# Altium PCB Module1BrandonPollack.PcbDoc
Units mil, origin at the board's own origin, x right, y up, seen from the top; angles counter-clockwise.
Board outline 1910 x 1505 mil, 2 copper layers (Top Layer, Bottom Layer); 22 components, 16 nets, 63 pads, 5 vias.
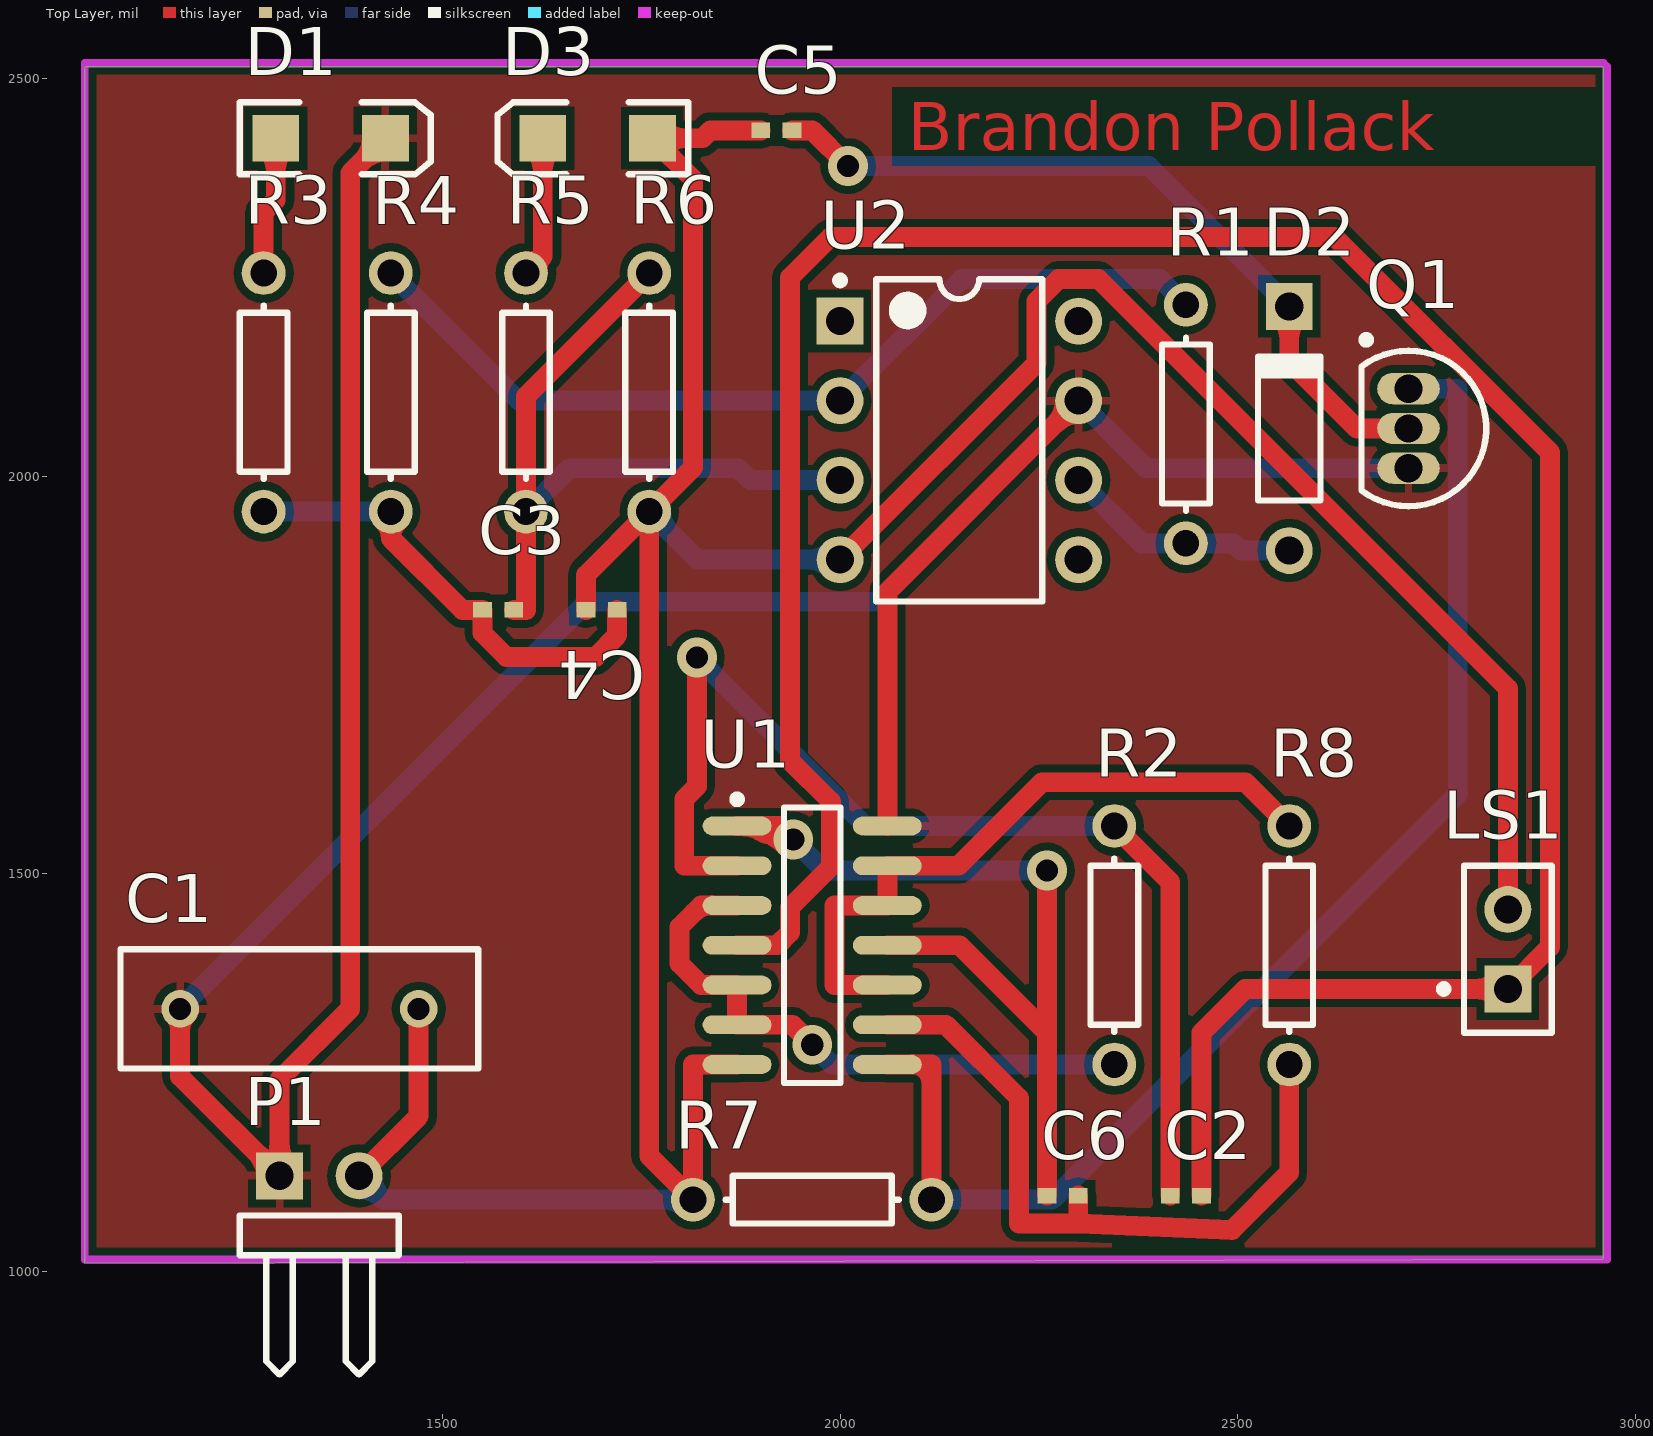
[diagram p0: Top Layer view]
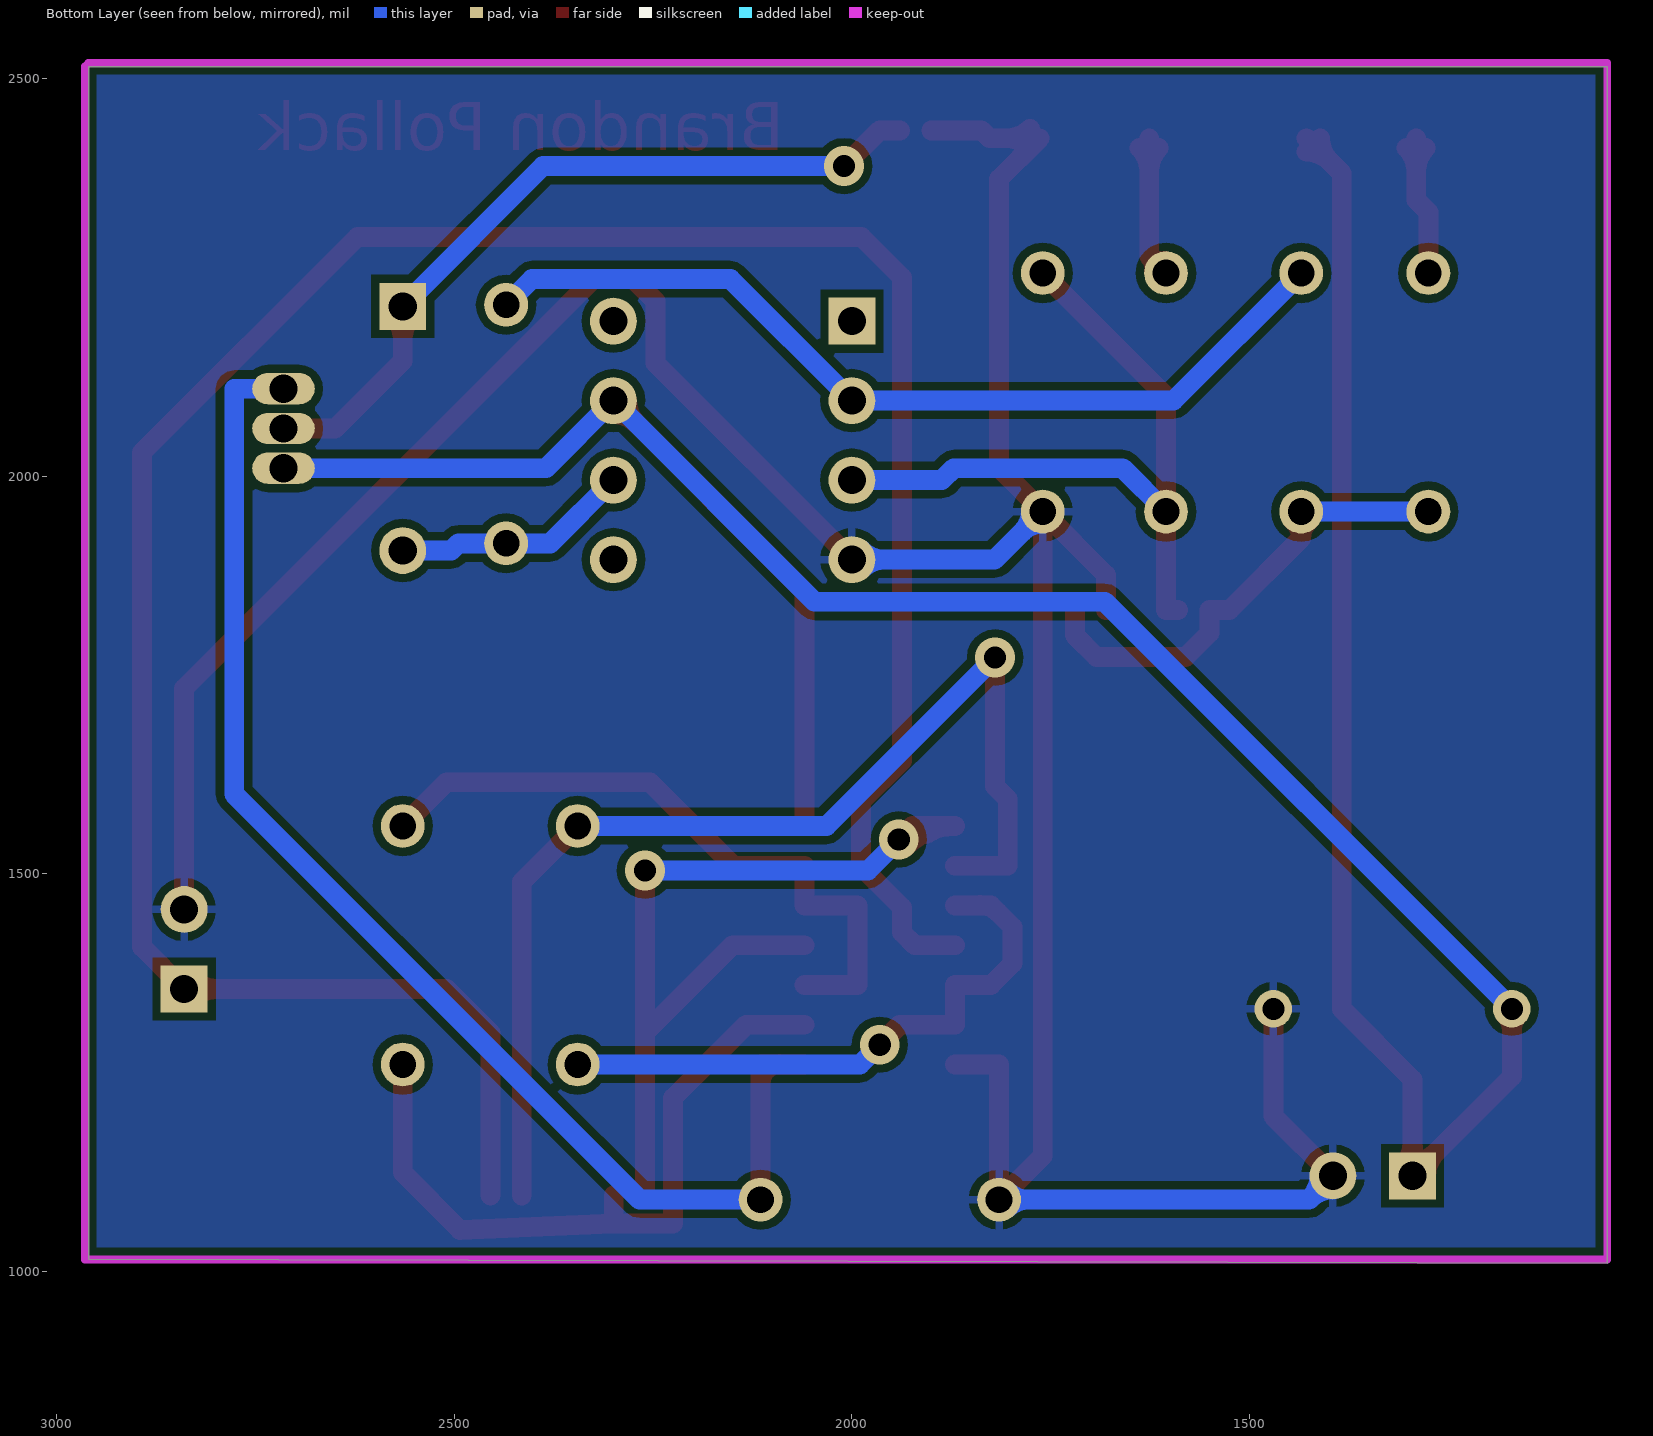
[diagram p1: Bottom Layer view, seen from below]

## Layer stack, top to bottom
Top Layer: signal copper 1.4
Dielectric: dielectric 12.6, FR-4, Dk 4.8
Bottom Layer: signal copper 1.4

## Board outline
1050,1010 1050,2515 2960,2515 2960,1015

## Design rules (kind name [scope] priority, off if disabled: settings)
Clearance [All] p1: gap=10
PolygonConnect [All] p1: connectstyle=Relief reliefconductorwidth=10 reliefentries=4 polygonreliefangle="90 Angle" airgapwidth=10
RoutingVias [All] p1: holewidth=28 width=50 viastyle="Through Hole" minholewidth=28 minwidth=50 maxholewidth=28 maxwidth=50
SilkscreenOverComponentPads [All] p1: minsilkscreentomaskgap=10
SolderMaskExpansion [All] p1: expansion=4
Width [All] p1: maxlimit=30 minlimit=20 preferedwidth=25
27 further rules are at their usual default settings.

## Components (designator, comment, footprint, x,y, rotation, side; value= is the part's Value field where it differs from the comment)
C1 "Cap" RAD-0.3 1320,1330 r180 top
C2 "Cap" 0402 2435,1095 r0 top
C3 "Cap" 0402 1570,1831.81 r180 top
C4 "Cap" 0402 1700,1831.81 r0 top
C5 "Cap" 0402 1920,2435 r0 top
C6 "Cap" 0402 2280,1095 r180 top
D1 "LED2" 3.2X1.6X1.1 1359.17,2425 r0 top
D2 "Diode 1N4149" DO-35A 2565,2060 r90 top
D3 "LED2" 3.2X1.6X1.1 1695,2425 r180 top
LS1 "Speaker" PIN2 2840,1355 r90 top
P1 "Header 2H" HDR1X2H 1295,1120 r0 top
Q1 "2N3904" TO-92A 2715,2060 r180 top
R1 "Res1" AXIAL-0.3 2435,2065.51 r90 top
R2 "Res1" AXIAL-0.3 2345,1410 r270 top
R3 "Res1" AXIAL-0.3 1275,2105.51 r270 top
R4 "Res1" AXIAL-0.3 1435,2105.51 r90 top
R5 "Res1" AXIAL-0.3 1605,2105.51 r270 top
R6 "Res1" AXIAL-0.3 1760,2105.51 r90 top
R7 "Res1" AXIAL-0.3 1965,1090 r180 top
R8 "Res1" AXIAL-0.3 2565,1410 r90 top
U1 "CD4093BCM" M14A_N 1965,1410 r0 top
U2 "LM741J" J08A 2150,2045 r0 top

## Footprints (in the part's own frame and the unit in brackets; to place one, negate y for a bottom-side part, rotate by r counter-clockwise, add the part's x,y. Pads: shape width x height; smd on the part's side, far side on the other; paste and mask are expansions set on the pad)
3.2X1.6X1.1 [mm] "SMT LED; 2 Flat Leads"
  rect 1.5x1.5 smd: 1(-1.75,0) 2(1.75,0)
  silkscreen extent -2.9,-1.15 3.2,1.15
0402 [mm] "Chip Capacitor, Body 1.0x0.5mm, IPC High Density"
  rect 0.6x0.5 smd: 1(-0.5,0) 2(0.5,0)
  body extent -0.55,-0.3 0.55,0.3, height 1.3
AXIAL-0.3 [mm] "Axial Device, Thru-Hole; 2 Leads; 0.3 in Pin Spacing"
  round 1.4 hole 0.85: 1(-3.81,0) 2(3.81,0)
  silkscreen extent -2.77,-0.76 2.77,0.76
DO-35A [mm] "Diode, Axial; Body 4.6 x 1.9 mm (LxDia. max), Lead Dia. 0.53 mm (max)"
  round 1.5 hole 0.9: 1(-3.9,0)
  rect 1.5x1.5 hole 0.9: 2(3.9,0)
  silkscreen extent -2.3,-1 2.4,1
HDR1X2H [mm] "Connector; Header; 2 Position; Right Angle"
  rect 1.5x1.5 hole 0.9: 1(0,0)
  round 1.5 hole 0.9: 2(2.54,0)
  silkscreen extent -1.27,-6.35 3.81,-1.27
J08A [mm] "DIP, 8-Leads, Row Spacing 7.62mm, Pitch 2.54mm, Body 9.78x6.73mm"
  rect 1.5x1.5 hole 0.9: 1(-3.81,3.81)
  round 1.5 hole 0.9: 2(-3.81,1.27) 3(-3.81,-1.27) 4(-3.81,-3.81) 5(3.81,-3.81) 6(3.81,-1.27) 7(3.81,1.27) 8(3.81,3.81)
  silkscreen extent -3.93,-5.15 2.65,5.23, body extent -3.6,-5.15 3.6,5.15, height 5.08
M14A_N [mm] "SOIC, 14-Leads, Body 8.6x3.9mm, Pitch 1.27mm, IPC Medium Density"
  oval 2.2x0.6 smd: 1(-2.4,3.81) 2(-2.4,2.54) 3(-2.4,1.27) 4(-2.4,0) 5(-2.4,-1.27) 6(-2.4,-2.54) 7(-2.4,-3.81) 8(2.4,-3.81) 9(2.4,-2.54) 10(2.4,-1.27) 11(2.4,0) 12(2.4,1.27) 13(2.4,2.54) 14(2.4,3.81)
  silkscreen extent -2.52,-4.4 0.9,4.78, body extent -2,-4.38 2,4.38, height 1.75
PIN2 [mm] "Photosensitive Diode; 2 Leads"
  rect 1.5x1.5 hole 0.9: 1(0,0)
  round 1.5 hole 0.9: 2(2.54,0)
  silkscreen extent -1.4,-1.4 3.94,2.17
RAD-0.3 [mm] "Radial Cap, Thru-Hole; 2 Leads; 0.3 in Pin Spacing"
  round 1.2 hole 0.7: 1(-3.81,0) 2(3.81,0)
  silkscreen extent -5.71,-1.91 5.71,1.91
TO-92A [mm] "TO, Flat Index; 3 In-Line, Axial Leads; Body Dia. 4.5mm; Leads 0.51 x 0.48 mm (max)"
  oval 2x1 hole 0.9: 1(0,-1.27) 2(0,0) 3(0,1.27)
  silkscreen extent -2.48,-2.95 1.5,2.48, body extent -2.5,-2.5 1.5,2.5, height 6.86

## Part data
C1 C2 C3 C4 C5 C6: "Capacitor"
D1 D3: "Typical RED, GREEN, YELLOW, AMBER GaAs LED"
D2: "Computer Diode"
LS1: "Loudspeaker"
P1: "Header, 2-Pin, Right Angle"
Q1: "NPN General Purpose Amplifier"
R1 R2 R3 R4 R5 R6 R7 R8: "Resistor"
U1: "Quad 2-Input Schmitt-Trigger NAND Gate, 14-Pin SOIC"
U2: "Operational Amplifier, 8-pin CerDIP"

## Via types
v1: diameter 50, hole 28, Top Layer to Bottom Layer, 5 vias

## Nets (pads, with @x,y where several pads share a name; then routed paths per layer and width w, separated by ;. In a path a pad name is that pad's centre, name@x,y a point inside that pad or via, vN(x,y) a via of type N, cw(c..) or ccw(c..) an arc to the next point about the centre after c; other vN are vias at no path point)
FEEDBACK: R1.2 R4.2 U2.2 | length 1143.3
  Bottom Layer w25: R4.2 1595.51,2095 U2.2 2153,2248 2402.51,2248 R1.2
GND: C1.1 C4.1 C5.1 D3.1 LS1.2 P1.2 R6.1 R7.2 U1.7 U2.4 | length 5002.2
  Top Layer w25: P1.2 1470,1195 C1.1 ; C4.1 1680.32,1875.83 R6.1 ; U1.7 1815,1260 R7.2 1760,1145 R6.1 ; C5.1 1837,2435 1827,2425 D3.1 1815,2373.9 1815,2010.51 R6.1 ; U2.4 2247,2142 2247,2220 2275,2248 2325,2248 2840,1733 LS1.2 ; 1805.01,2425 cw(c1805.01,2466.11) 1775.94,2437.04 ccw(c1805.01,2466.11) 1805.01,2425 ; 1805.01,2425 ccw(c1805.01,2383.89) 1775.94,2412.96 cw(c1805.01,2383.89) 1805.01,2425
  Bottom Layer w25: P1.2 1425,1090 R7.2 ; R6.1 1820.51,1895 U2.4 ; 1424.07,1090.93 cw(c1453.14,1120) 1412.03,1120 ccw(c1453.14,1120) 1424.07,1090.93 ; 1424.07,1090.93 ccw(c1395,1061.86) 1395,1102.97 cw(c1395,1061.86) 1424.07,1090.93 ; 1778.64,1090 cw(c1778.64,1053.64) 1804.35,1079.35 ccw(c1778.64,1053.64) 1778.64,1090 ; 1778.64,1090 ccw(c1778.64,1126.36) 1804.35,1100.65 cw(c1778.64,1126.36) 1778.64,1090 ; 1785.71,1929.8 cw(c1811.41,1955.51) 1775.06,1955.51 ccw(c1811.41,1955.51) 1785.71,1929.8 ; 1785.71,1929.8 ccw(c1760,1904.1) 1760,1940.45 cw(c1760,1904.1) 1785.71,1929.8 ; 1958.89,1895 cw(c1958.89,1853.89) 1987.96,1882.96 ccw(c1958.89,1853.89) 1958.89,1895 ; 1958.89,1895 ccw(c1958.89,1936.11) 1987.96,1907.04 cw(c1958.89,1936.11) 1958.89,1895
NetC2_1: C2.1 R2.1 U1.2 | length 1442.1
  Top Layer w25: v1(1820,1772) 1820,1610 1804,1594 1804,1510 U1.2 ; R2.1 2415.32,1489.68 C2.1
  Bottom Layer w25: v1(1820,1772) 2032,1560 R2.1
NetC2_2: C2.2 LS1.1 U1.4 | length 3468.3
  Top Layer w25: U1.4 1921,1410 1937,1426 1937,1457.5 1988.5,1509 1988.5,1590.63 1937,1642.13 1937,2250 1988,2301 2622,2301 2893,2030 2893,1408 LS1.1 2509.69,1355 2454.69,1300 C2.2 ; 2798.89,1355 cw(c2798.89,1313.89) 2827.96,1342.96 ccw(c2798.89,1313.89) 2798.89,1355 ; 2798.89,1355 ccw(c2798.89,1396.11) 2827.96,1367.04 cw(c2798.89,1396.11) 2798.89,1355
NetC3_1: C3.1 R5.2 R6.2 U2.3 | length 927
  Top Layer w25: C3.1 1605,1831.81 R5.2 1605,2100.51 R6.2
  Bottom Layer w25: R5.2 1659.49,2010 1872,2010 1887,1995 U2.3
NetC3_2: C3.2 C4.2 R3.2 R4.1 | length 701.8
  Top Layer w25: R4.1 1435,1921.81 ; C4.2 1719.69,1800 1692.37,1772.69 1580.31,1772.69 1550.31,1802.69 C3.2 1525,1831.81 1435,1921.81 ; 1435,1921.81 cw(c1465.17,1921.81) 1445.05,1944.29 ccw(c1465.17,1921.81) 1435,1921.81 ; 1435,1921.81 ccw(c1404.83,1921.81) 1424.95,1944.29 cw(c1404.83,1921.81) 1435,1921.81
  Bottom Layer w25: R3.2 R4.1
NetC5_2: C5.2 D2.2 Q1.2 | length 1099.9
  Top Layer w25: C5.2 1965,2435 v1(2010,2390) ; D2.2 2565,2145 2650,2060 Q1.2 ; 2565,2172.44 cw(c2606.11,2172.44) 2577.04,2201.5 ccw(c2606.11,2172.44) 2565,2172.44 ; 2565,2172.44 ccw(c2523.89,2172.44) 2552.96,2201.5 cw(c2523.89,2172.44) 2565,2172.44
  Bottom Layer w25: v1(2010,2390) 2388.54,2390 D2.2
NetC6_1: C6.1 R8.1 U1.9 | length 902.6
  Top Layer w25: U1.9 2133,1310 2225,1218 2225,1060 2299.69,1060 ; C6.1 2299.69,1060 ; R8.1 2565,1124 2493,1052 2299.69,1060
NetC6_2: C6.2 U1.1 U1.11 | length 1288.5
  Top Layer w25: U1.1@1899.32,1553.48 ccw(c1916.74,1583.15) v1@1934.53,1553.7 ; U1.1@1901.41,1559.66 ccw(c1924.07,1572.74) v1@1917.3,1547.46 ; U1.1@1909.56,1551.93 ccw(c1920.69,1571.21) v1@1933.7,1553.14 ; v1(1941,1543) 1924,1560 U1.1 ; U1.11 2150.31,1410 2260.31,1300 ; C6.2 2260.31,1300 ; v1(2260.31,1504) 2260.31,1300 ; U1.1 cw(c1870.52,1473.55) 1932.1,1534.23 ccw(c1870.52,1473.55) U1.1
  Bottom Layer w25: v1(1941,1543) 1980,1504 v1(2260.31,1504)
NetD2_1: D2.1 R1.1 U2.6 | length 301.7
  Bottom Layer w25: U2.6 2379.49,1915.51 R1.1 2495,1915.51 2504.06,1906.46 D2.1
NetD3_2: D3.2 R5.1 | length 389.8
  Top Layer w25: R5.1 1626.1,2276.61 ; D3.2 1626.1,2276.61 ; 1626.1,2276.61 cw(c1610.52,2292.2) 1607.24,2270.4 ccw(c1610.52,2292.2) 1626.1,2276.61 ; 1626.1,2276.61 ccw(c1641.68,2261.03) 1619.89,2257.75 cw(c1641.68,2261.03) 1626.1,2276.61 ; 1626.1,2383.89 cw(c1667.21,2383.89) 1638.14,2412.96 ccw(c1667.21,2383.89) 1626.1,2383.89 ; 1626.1,2383.89 ccw(c1584.99,2383.89) 1614.06,2412.96 cw(c1584.99,2383.89) 1626.1,2383.89
NetQ1_1: Q1.1 R7.1 U1.8 | length 1747
  Top Layer w25: U1.8 2115,1260 R7.1 ; U1.8@2091,1260.69 cw(c2090.29,1235.98) 2115,1235.98 ccw(c2090.29,1235.98) U1.8@2091,1260.69
  Bottom Layer w25: R7.1 2267,1090 2777,1600 2777,2110 Q1.1
NetR2_2: R2.2 U1.3 U1.5 U1.6 | length 809.1
  Top Layer w25: U1.3 1825,1460 1798,1433 1798,1387 1825,1360 U1.5 U1.6 1940,1310 v1(1965,1285) ; 1816.27,1451.27 cw(c1839.02,1428.52) 1839.02,1460.69 ccw(c1839.02,1428.52) 1816.27,1451.27
  Bottom Layer w25: v1(1965,1285) 1990,1260 R2.2
NetR8_2: R8.2 U1.10 U1.12 U1.13 | length 854.8
  Top Layer w25: U1.10 1993,1360 1993,1460 U1.12 U1.13 2149,1510 2254,1615 2510,1615 R8.2
TODIODE: D1.1 R3.1 | length 305
  Top Layer w25: R3.1 1275,2332 1290.28,2347.28 D1.1 ; 1290.28,2383.89 cw(c1331.38,2383.89) 1302.32,2412.96 ccw(c1331.38,2383.89) 1290.28,2383.89 ; 1290.28,2383.89 ccw(c1249.17,2383.89) 1278.24,2412.96 cw(c1249.17,2383.89) 1290.28,2383.89
VCC: C1.2 D1.2 P1.1 Q1.3 U1.14 U2.7 | length 4754.5
  Top Layer w25: C1.2 1170,1245 P1.1 1295,1241 1384,1330 1384,2380.93 D1.2 ; U1.14 2059.49,1854.49 U2.7 ; 1170,1303.15 cw(c1196.85,1303.15) 1177.86,1322.14 ccw(c1196.85,1303.15) 1170,1303.15 ; 1170,1303.15 ccw(c1143.15,1303.15) 1162.14,1322.14 cw(c1143.15,1303.15) 1170,1303.15 ; P1.1@1265.93,1149.07 cw(c1236.86,1120) 1277.97,1120 ccw(c1236.86,1120) P1.1@1265.93,1149.07 ; P1.1@1265.93,1149.07 ccw(c1295,1178.14) 1295,1137.03 cw(c1295,1178.14) P1.1@1265.93,1149.07 ; 1295,1161.11 cw(c1253.89,1161.11) 1282.96,1132.04 ccw(c1253.89,1161.11) 1295,1161.11 ; 1295,1161.11 ccw(c1336.11,1161.11) 1307.04,1132.04 cw(c1336.11,1161.11) 1295,1161.11 ; D1.2@1399,2395.93 cw(c1428.07,2366.86) 1428.07,2407.97 ccw(c1428.07,2366.86) D1.2@1399,2395.93 ; D1.2@1399,2395.93 ccw(c1369.93,2425) 1411.04,2425 cw(c1369.93,2425) D1.2@1399,2395.93 ; 2270.93,2065.93 cw(c2300,2036.86) 2300,2077.97 ccw(c2300,2036.86) 2270.93,2065.93 ; 2270.93,2065.93 ccw(c2241.86,2095) 2282.97,2095 cw(c2241.86,2095) 2270.93,2065.93
  Bottom Layer w25: C1.2 1682,1842 2047,1842 U2.7 2385,2010 Q1.3
pads on no net: U2.1 U2.5 U2.8

## Polygon pours and split planes (outlines as drawn)
VCC on Top Layer "VCCpour" (solid, pour order 8): 2965,1015 1050,1015 1050,2520 2960,2520 2965,2515 2965,1015
GND on Bottom Layer "VCCpour" (solid, pour order 10): 2965,1015 1050,1015 1050,2520 2960,2520

## Keep-outs
Keep-Out Layer:
  lines w10: 1050,1015 1050,2520 2960,2520 2965,2515 2965,1015 1050,1015

## Other copper
Top Layer:
  text "Brandon Pollack" at 2085,2410 h60